# Altium PCB PC110-itx.PcbDoc (part 4 of 16)
Units mm, origin at the board's own origin, x right, y up, seen from the top; angles counter-clockwise.
Board outline 170 x 170 mm, 16 copper layers (FC1, FC2, FC3, FC4, IP1, IC1, IC2, IP2, IP3, IC3, IC4, IP4, BC4, BC3, BC2, BC1), stack 3.903 mm thick; 935 components, 1357 nets, 4698 pads, 3240 vias.
Unrouted connection lines stored in the file: 552.
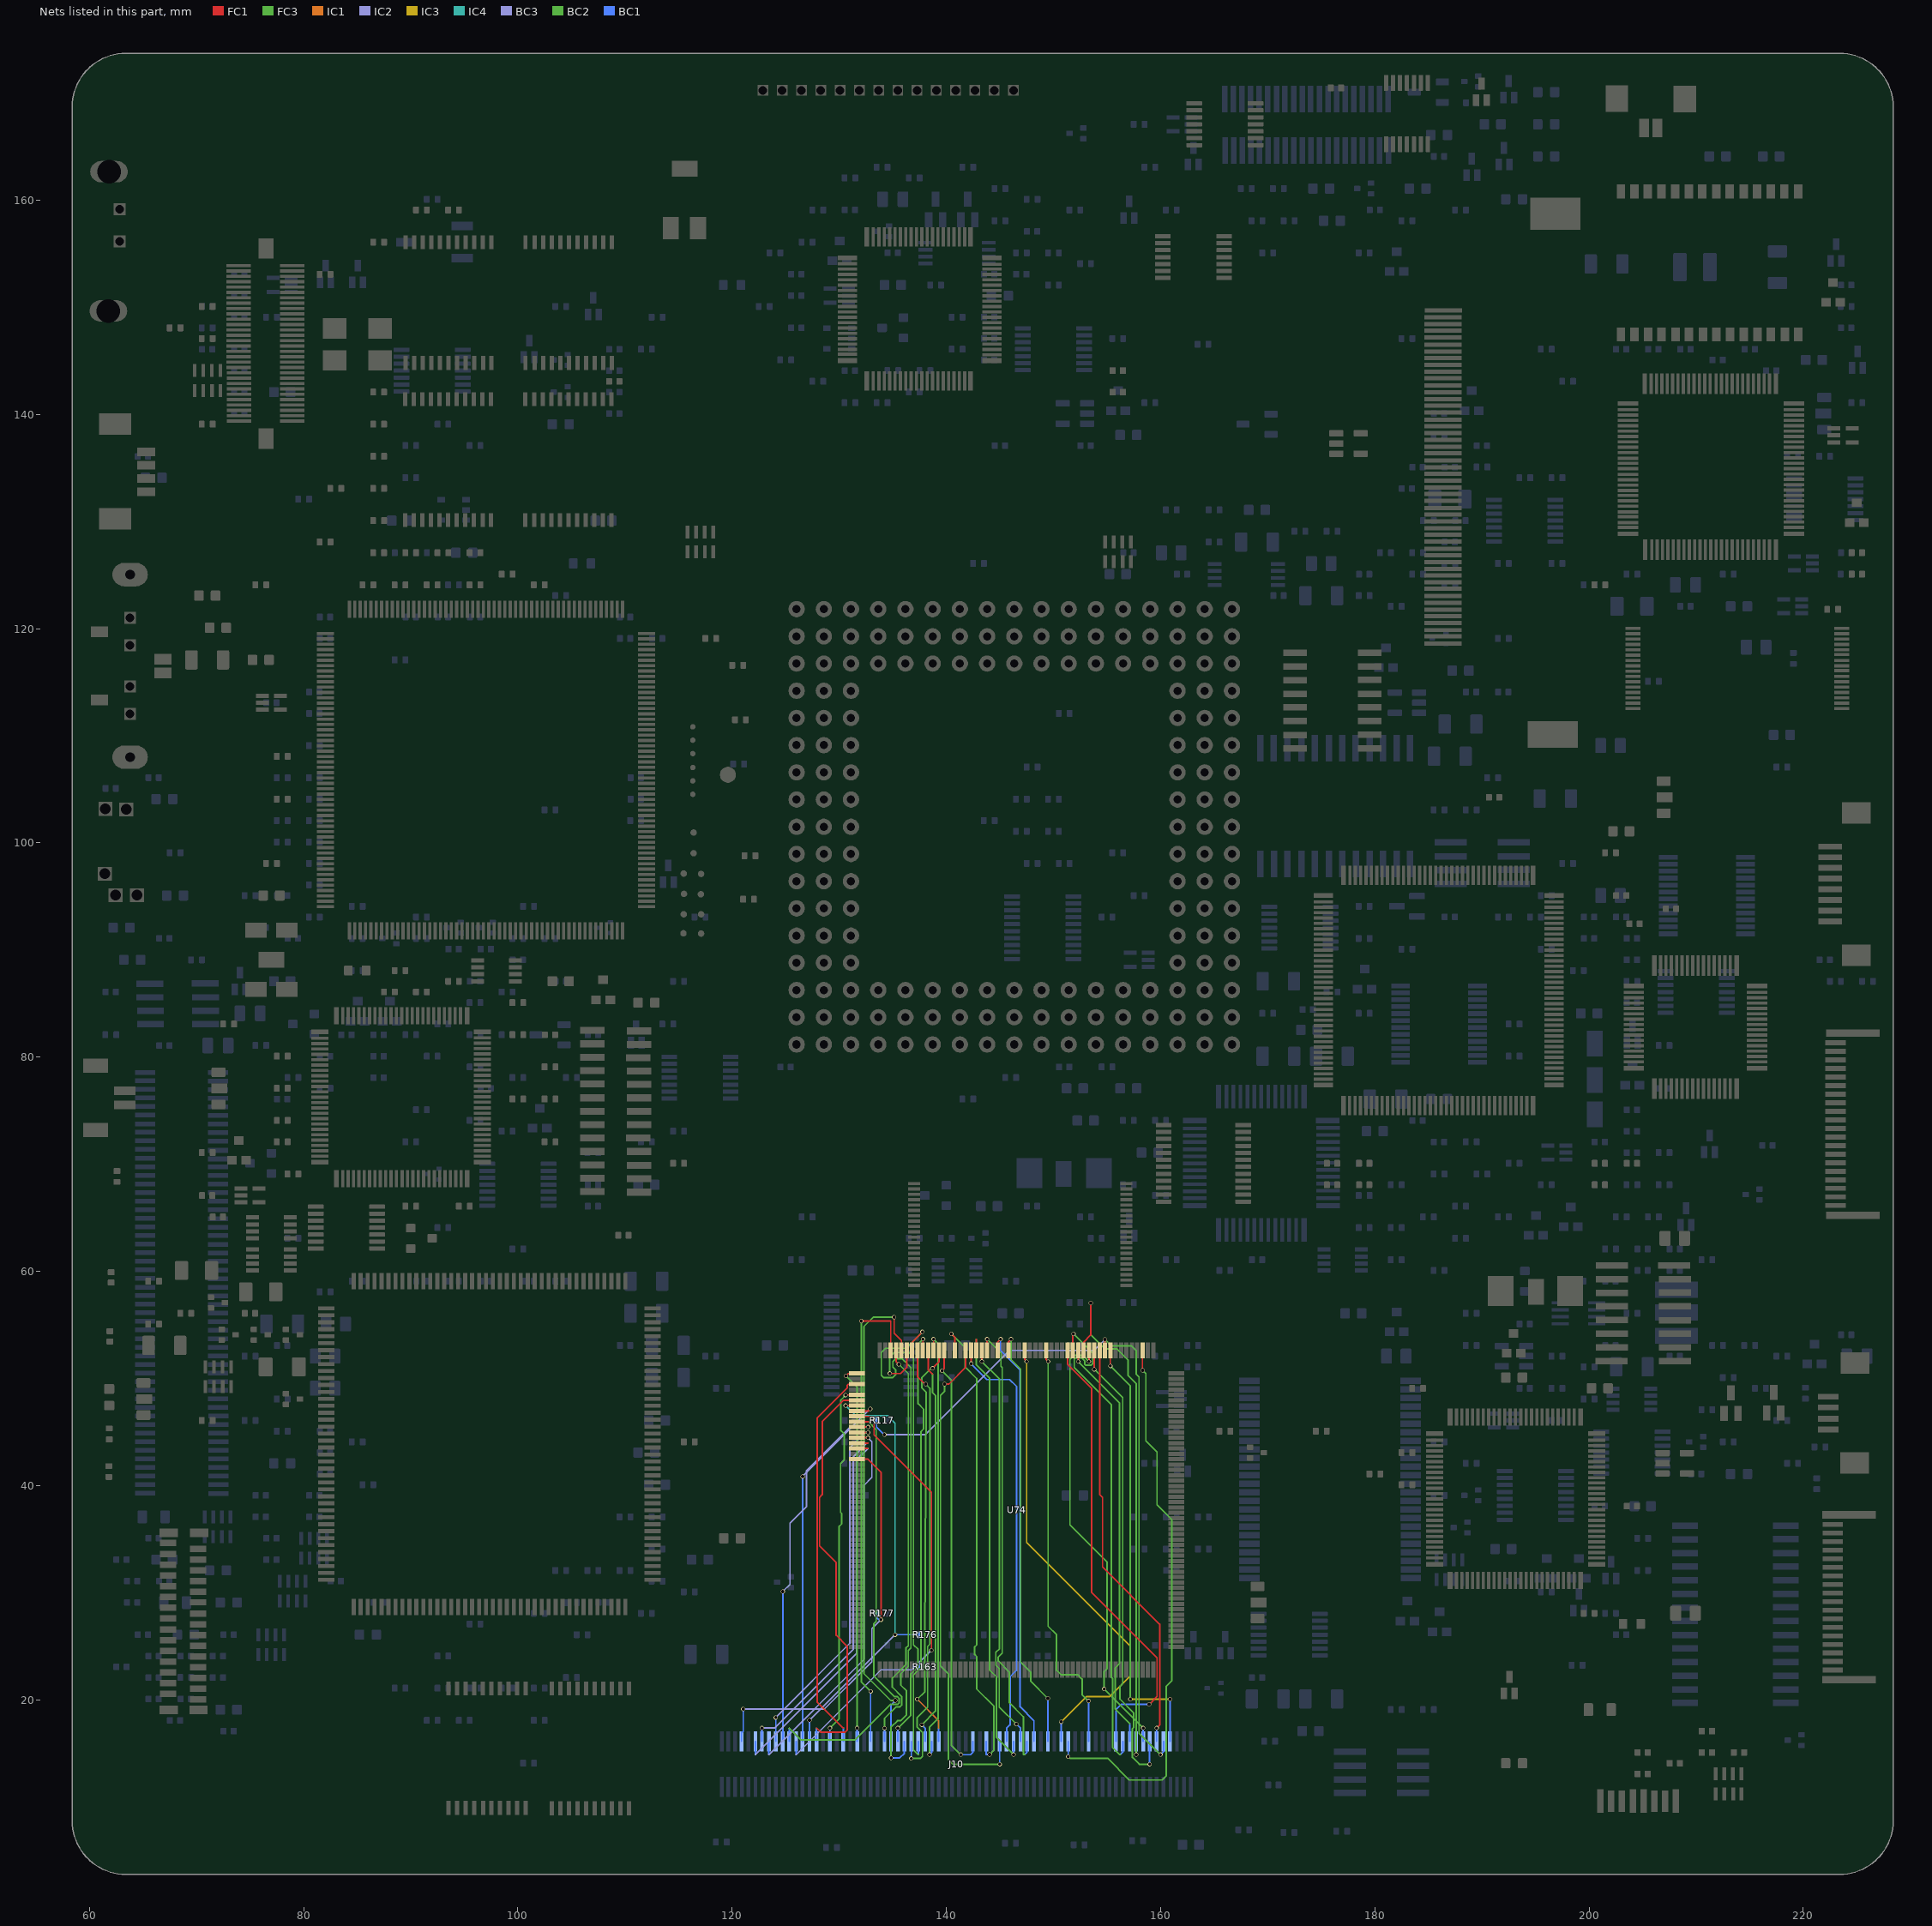
[diagram p17: the nets of this part, all layers, seen from the top]

## Via types
v1: diameter 0.4, hole 0.3, FC1 to BC1, 3240 vias

## Nets (pads, with @x,y where several pads share a name; then routed paths per layer and width w, separated by ;. In a path a pad name is that pad's centre, name@x,y a point inside that pad or via, vN(x,y) a via of type N, cw(c..) or ccw(c..) an arc to the next point about the centre after c; other vN are vias at no path point) (continued)
ACD1: (continued)
  BC3 w0.15: v1(124.079,18.364) 130.988,25.273 130.988,43.536 132.41,44.958 v1(132.69,44.958)
  BC1 w0.15: J10.62@124.079,16.129 v1(124.079,18.364)
ACD1#: J10.5 R117.2 U74.10 | length 70.3
  FC1 w0.15: U74.10@154.808,52.619 v1(154.808,53.649)
  FC3 w0.15: v1(154.808,53.649) 155.396,53.061 157.277,53.061 157.733,52.604 157.733,50.383 157.988,50.128 157.988,16.891 v1(159.995,14.884)
  BC3 w0.15: v1(134.214,44.755) 138.024,44.755 145.898,52.629 153.788,52.629 v1(154.808,53.649)
  BC1 w0.15: R117.2@133.49,46.09 133.49,45.478 v1(134.214,44.755) ; v1(159.995,14.884) 160.279,15.169 J10.5@160.279,16.129
ACD2: J10.64 U74.66 | length 33.7
  FC1 w0.15: U74.66@131.658,43.969 132.688,43.969 132.69,43.967 132.588,43.967
  BC3 w0.15: v1(122.779,17.374) 123.952,17.374 131.318,24.74 131.318,42.697 132.588,43.967
  BC1 w0.15: J10.64@122.779,16.129 v1(122.779,17.374)
ACD2#: J10.67 R177.2 U74.69 | length 38.7
  FC1 w0.15: U74.69@131.658,42.469 132.688,42.469 133.896,41.261 v1(133.896,27.49)
  IC2 w0.15: v1(121.04,19.152) 128.626,19.152 133.045,23.571 133.045,26.639 v1(133.896,27.49)
  BC1 w0.15: J10.67@120.879,16.129 120.879,17.004 121.04,17.004 v1(121.04,19.152) ; R177.2@133.49,28.09 133.49,27.693 133.693,27.49 v1(133.896,27.49)
ACD3: J10.4 U74.9 | length 41
  FC1 w0.15: v1(155.308,51.181) U74.9@155.308,52.619
  FC3 w0.15: v1(155.308,51.181) 157.175,49.314 v1(157.175,20.071)
  IC3 w0.15: v1(157.175,20.071) v1(160.879,20.071)
  BC1 w0.15: J10.4@160.879,16.129 v1(160.879,20.071)
ACD4: J10.6 U74.11 | length 38.9
  FC1 w0.15: U74.11@154.308,52.619 154.308,39.188 154.584,38.912 154.584,32.4 159.918,27.065 159.918,17.663 v1(159.629,17.374)
  BC1 w0.15: J10.6@159.629,16.129 v1(159.629,17.374)
ACD5: J10.8 U74.13 | length 41.9
  FC1 w0.15: v1(153.308,51.587) U74.13@153.308,52.619
  FC3 w0.15: v1(153.308,51.587) 152.723,52.172 151.912,52.172 151.536,51.797 151.536,36.322 155.016,32.842 155.016,22.929 154.737,22.649 v1(154.737,21.016)
  BC2 w0.15: v1(154.737,21.016) v1(158.379,17.374)
  BC1 w0.15: J10.8@158.379,16.129 v1(158.379,17.374)
ACD6: J10.10 U74.15 | length 38.8
  FC1 w0.15: v1(152.308,51.587) U74.15@152.308,52.619
  FC3 w0.15: v1(152.308,51.587) 156.159,47.736 156.159,23.368 155.75,22.959 155.75,19.155 157.129,17.775
  BC1 w0.15: J10.10@157.129,16.129 157.129,17.775
ACD7: J10.12 U74.17 | length 43.1
  FC1 w0.15: U74.17@151.308,52.619 151.308,51.342 153.549,49.101 153.549,30.042 159.664,23.927 159.664,20.32 v1(158.928,19.583)
  BC1 w0.15: J10.12@155.829,16.129 155.829,19.101 156.312,19.583 v1(158.928,19.583)
ACD8: J10.61 U74.63 | length 34.6
  FC1 w0.15: U74.63@131.658,45.469 v1(132.69,45.469)
  BC3 w0.15: v1(124.729,30.114) 125.4,30.785 125.4,36.5 126.949,38.049 126.949,41.402 131.016,45.469 v1(132.69,45.469)
  BC1 w0.15: J10.61@124.729,16.129 v1(124.729,30.114)
ACD9: J10.63 U74.65 | length 36
  FC1 w0.15: U74.65@131.658,44.469 v1(132.696,44.469)
  BC3 w0.15: 123.429,14.895 132.309,23.774 132.309,40.03 133.045,40.767 133.045,44.12 v1(132.696,44.469)
  BC1 w0.15: 123.429,14.895 J10.63@123.429,16.129
ACD10: J10.65 U74.67 | length 35.2
  FC1 w0.15: U74.67@131.658,43.469 132.674,43.469
  BC3 w0.15: 122.179,14.889 131.623,24.333 131.623,42.418 132.674,43.469
  BC1 w0.15: 122.179,14.889 J10.65@122.179,16.129
ACD11: J10.7 U74.12 | length 43.8
  FC1 w0.15: v1(153.808,50.865) U74.12@153.808,52.619
  FC3 w0.15: v1(153.808,50.865) 156.464,48.209 156.464,21.514 156.21,21.26 156.21,20.066 157.48,18.796 157.48,17.424 157.378,17.323 157.378,14.63 158.013,13.995 v1(158.979,13.995)
  BC1 w0.15: v1(158.979,13.995) J10.7@158.979,16.129
ACD12: J10.9 U74.14 | length 50.5
  FC1 w0.15: U74.14@152.808,52.619 152.808,53.392 153.475,54.059 v1(153.475,57.048)
  FC3 w0.15: v1(153.475,57.048) 153.475,54.12 154.838,52.756 155.928,52.756 156.953,51.73 156.953,50.296 157.734,49.515 v1(157.734,14.884)
  BC1 w0.15: J10.9@157.729,16.129 157.729,14.889 v1(157.734,14.884)
ACD13: J10.11 U74.16 | length 47.5
  FC1 w0.15: U74.16@151.808,52.619 151.808,54.12 v1(151.867,54.178)
  FC3 w0.15: v1(151.867,54.178) 153.67,52.375 153.67,51.385 153.518,51.232 153.01,51.232 152.908,51.334 152.908,51.653 152.619,51.942 152.069,51.942 151.943,51.816 151.943,51.029 155.397,47.574 155.397,22.123 155.52,22.001 155.52,15.549 156.159,14.91 156.261,14.91
  BC1 w0.15: 156.261,14.91 156.479,15.128 J10.11@156.479,16.129